# EAGLE board Vocodec_rev3_unbuilt (EAGLE 6.5.0), part 1 of 2
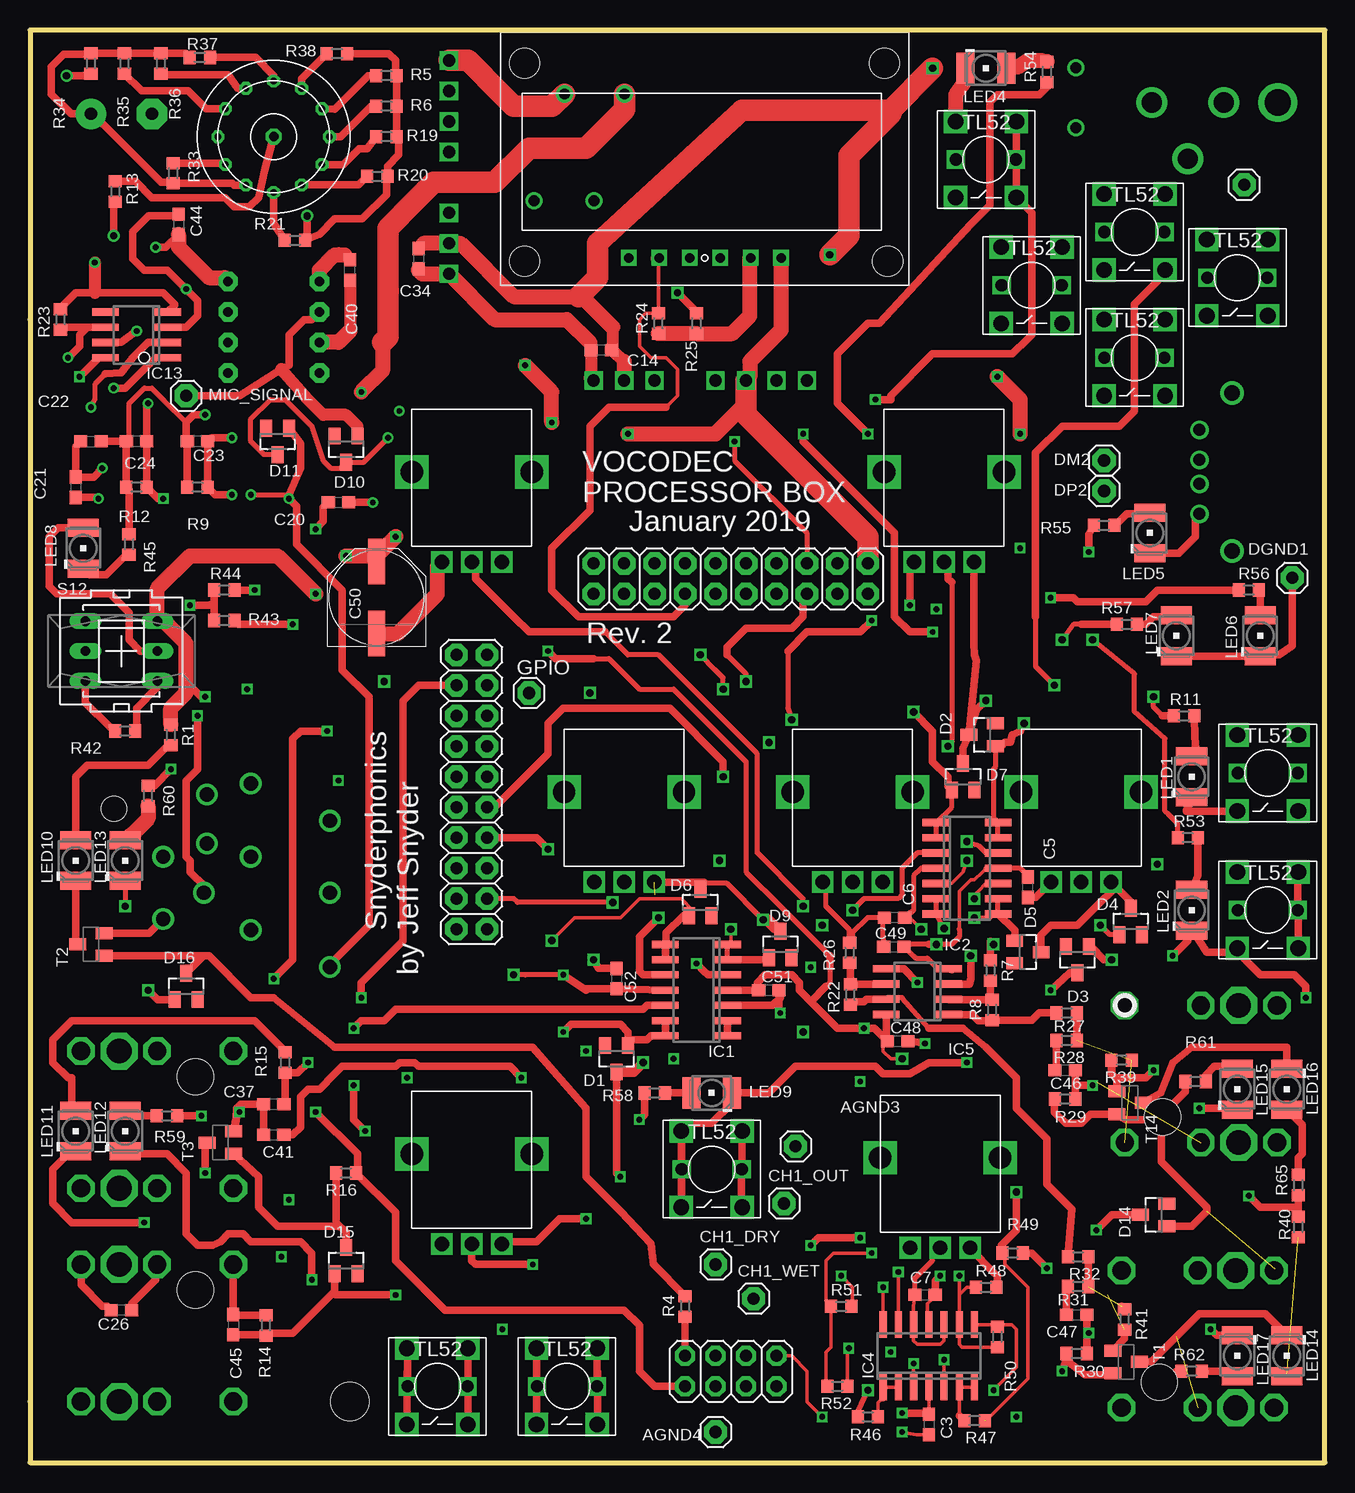
[diagram p0: board, top side]
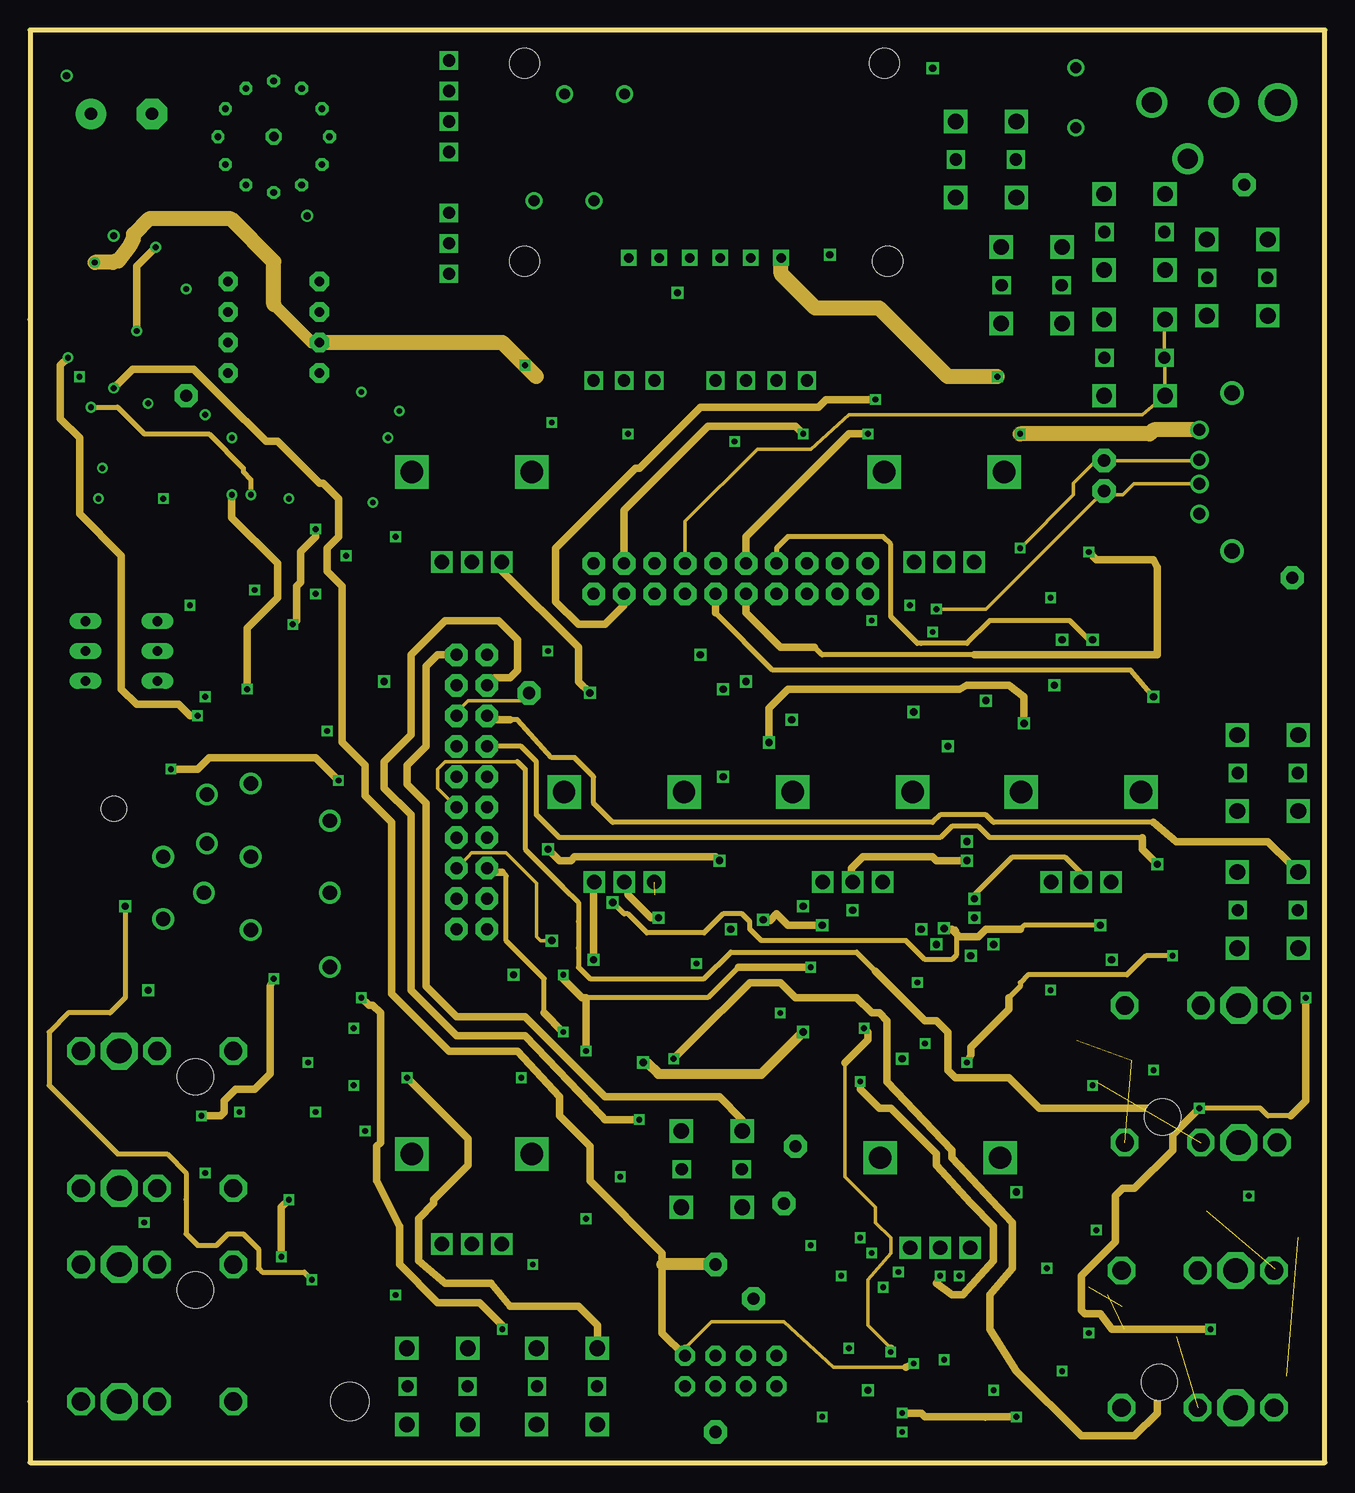
[diagram p1: board, inner layer Route2]
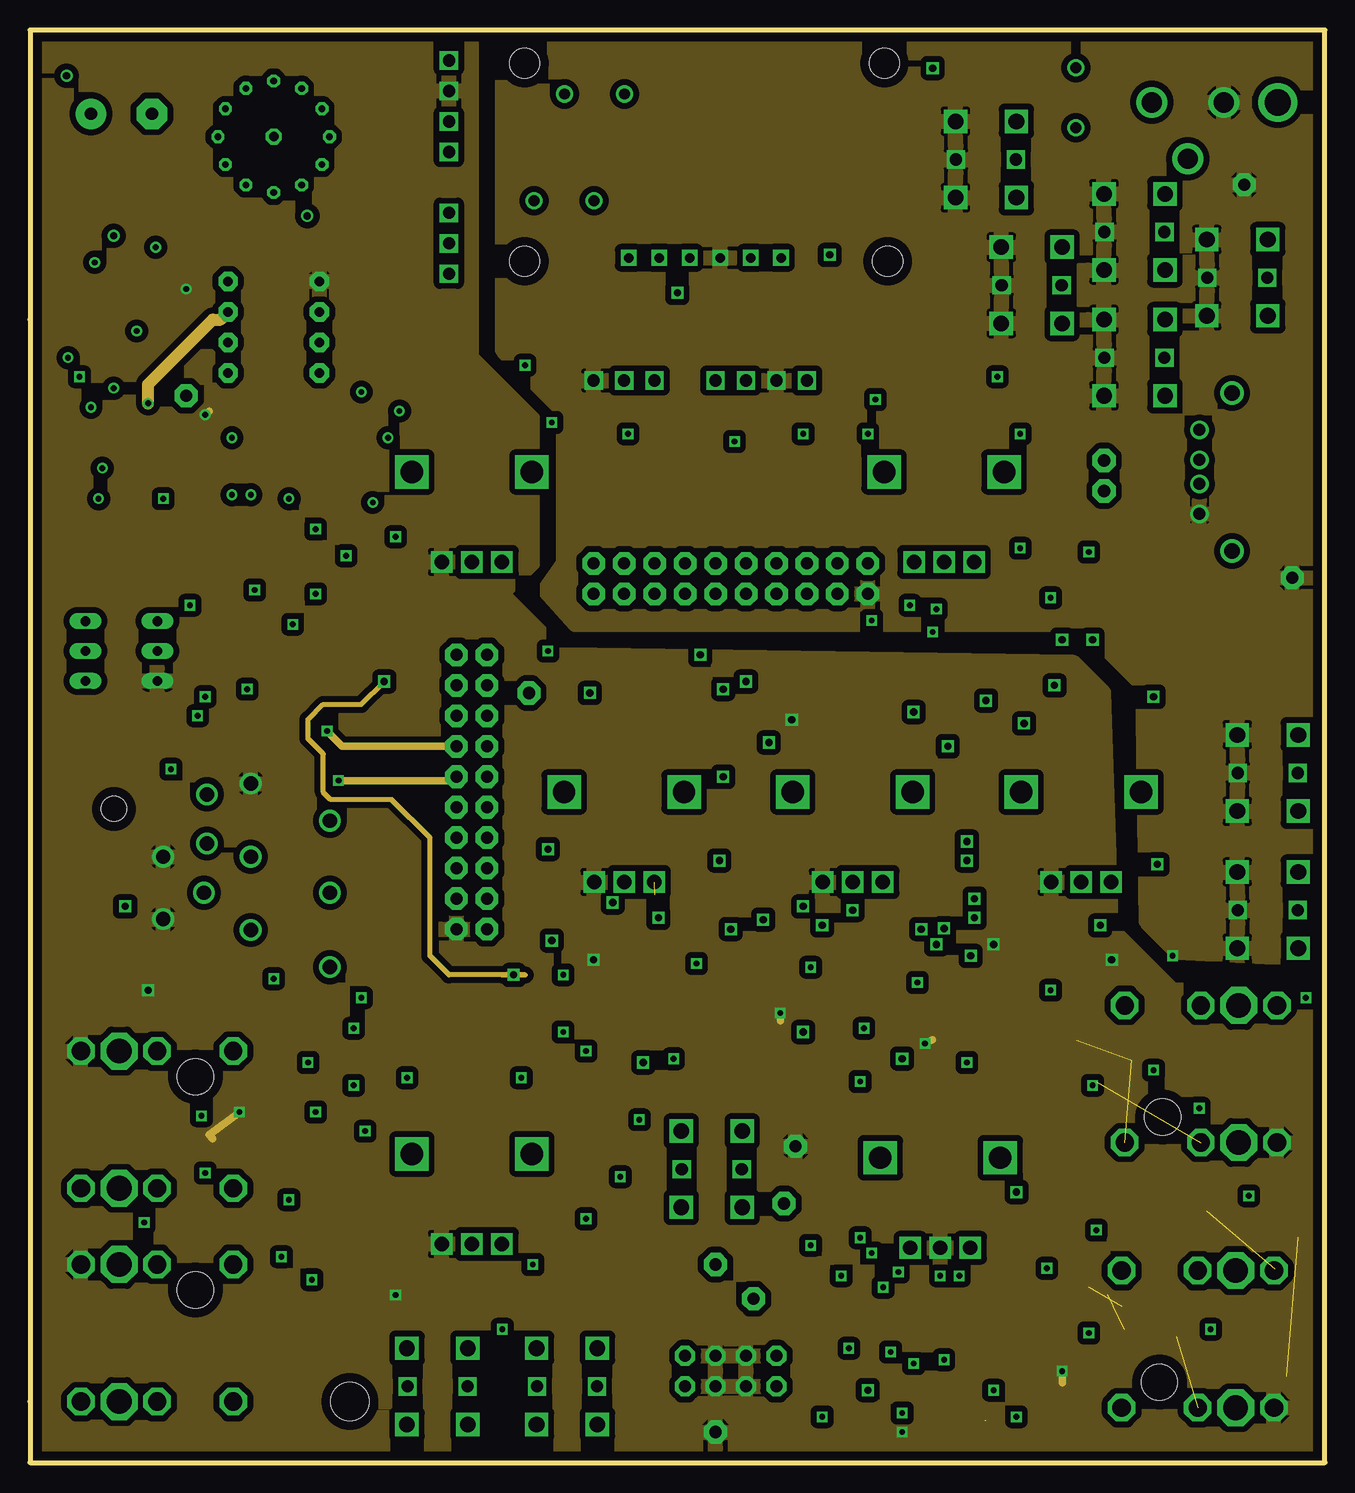
[diagram p2: board, inner layer Route15]
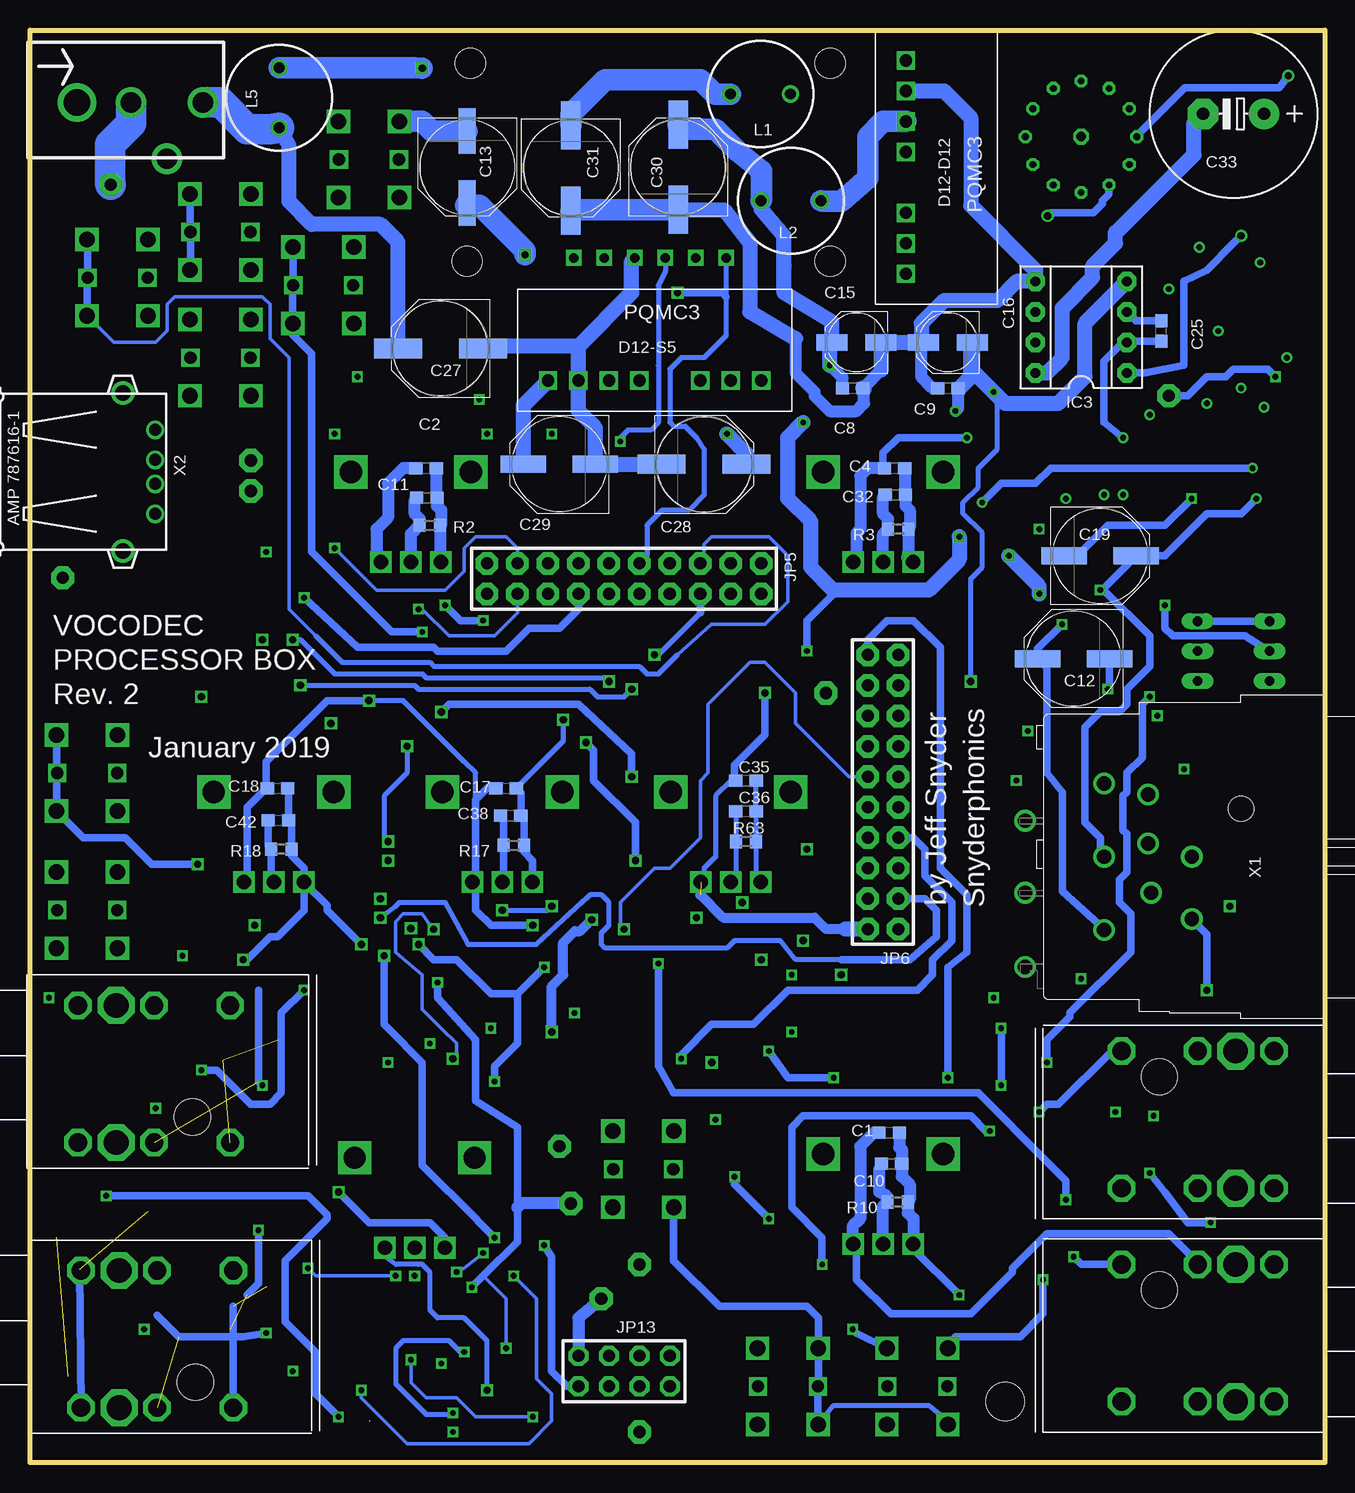
[diagram p3: board, bottom side, seen from below]

Size 107.95 x 119.38 mm. Coordinates in mm from the lower left corner, seen from the top.
Outline: 0,95.25 0,5.08 0,0 107.95,0 107.95,119.38 0,119.38 0,95.25
Copper layers (1+2*15+16): Top 0.035mm / dielectric 1mm / Route2 0.035mm / dielectric 1mm / Route15 0.035mm / dielectric 1mm / Bottom 0.035mm
Design rules "default *": minimum track width 12mil, minimum drill 19mil, track to track 20mil, track to pad 10mil, pad to pad 10mil, via to via 10mil, smd to smd 10mil, copper to edge 30mil, drill to drill 10mil, minimum pad ring 10mil, minimum via ring 8mil, stop-mask expansion 3mil, vias tented up to drill 0mil, thermal gap 10mil
Net classes: 1 POWER: width 0.813 mm, drill 0.559 mm, clearance 0.254 mm; 3 +12V: width 0.61 mm, drill 0.483 mm, clearance 0.254 mm
Holes 3.17 mm at 26.67,5.08 0,124.46 107.95,124.46 107.95,-5.08 0,-5.08
Milling: 4 lines

## Footprints (pad centres in the part's own frame; a part is rotated, then mirrored left to right if it is on the bottom)
1X01 = drill 1.016 pad 1.93 octagon: 1 0,0
C0603 = smd 1.1 x 1: 1 -0.85,0; 2 0.85,0
PANASONIC_E = smd 3.8 x 1.4: + 3,0; - -3,0
PANASONIC_C = smd 2.6 x 1.4: + 2.05,0; - -2.05,0
PANASONIC_F = smd 4 x 1.6: + 3.55,0; - -3.55,0
E5-13 = drill 1.016 pad 2.54: + -2.54,0 | drill 1.016 pad 2.54 octagon: - 2.54,0
SOT23 = smd 1 x 1.4: 1 -0.95,-1.1; 2 0.95,-1.1; 3 0,1.1
SO14 = smd 0.6 x 2.2: 1 -3.81,-2.6; 2 -2.54,-2.6; 3 -1.27,-2.6; 4 0,-2.6; 5 1.27,-2.6; 6 2.54,-2.6; 7 3.81,-2.6; 8 3.81,2.6; 9 2.54,2.6; 10 1.27,2.6; 11 0,2.6; 12 -1.27,2.6; 13 -2.54,2.6; 14 -3.81,2.6
DIL08 = drill 0.813 pad 1.6 octagon: 1 -3.81,-3.81; 2 -1.27,-3.81; 3 1.27,-3.81; 4 3.81,-3.81; 5 3.81,3.81; 6 1.27,3.81; 7 -1.27,3.81; 8 -3.81,3.81
SO08 = smd 0.6 x 2.2: 1 -1.905,-2.6; 2 -0.635,-2.6; 3 0.635,-2.6; 4 1.905,-2.6; 5 1.905,2.6; 6 0.635,2.6; 7 -0.635,2.6; 8 -1.905,2.6
PQMC3-D12-D12-S = drill 1.016 square: P$1 -7.62,0; P$2 -5.08,0; P$3 -2.54,0; P$4 2.54,0; P$5 5.08,0; P$6 7.62,0; P$7 10.16,0
SO8 = smd 0.6 x 2.2: 1 -1.905,-2.6; 2 -0.635,-2.6; 3 0.635,-2.6; 4 1.905,-2.6; 5 1.905,2.6; 6 0.635,2.6; 7 -0.635,2.6; 8 -1.905,2.6
NRJ6HF2 = drill 2.057 octagon: POST1 -7.442,0; POST2 -7.442,-11.43 | drill 1.524 octagon: R -10.6,0; RN -10.6,-11.43; S -4.25,0; SN -4.25,-11.43; T -16.942,0; TN -16.942,-11.43 | hole 2.997: -13.792,-2.134
PJ-059B = drill 1.7: 1 3,0; 2 -3,0; 3 0,-4.7 | drill 2.2: P$1 -7.5,0
2X10 = drill 1.016 pad 1.88 octagon: 1 -11.43,-1.27; 2 -11.43,1.27; 3 -8.89,-1.27; 4 -8.89,1.27; 5 -6.35,-1.27; 6 -6.35,1.27; 7 -3.81,-1.27; 8 -3.81,1.27; 9 -1.27,-1.27; 10 -1.27,1.27; 11 1.27,-1.27; 12 1.27,1.27; 13 3.81,-1.27; 14 3.81,1.27; 15 6.35,-1.27; 16 6.35,1.27; 17 8.89,-1.27; 18 8.89,1.27; 19 11.43,-1.27; 20 11.43,1.27
2X04 = drill 1.016 pad 1.676 octagon: 1 -3.81,-1.27; 2 -3.81,1.27; 3 -1.27,-1.27; 4 -1.27,1.27; 5 1.27,-1.27; 6 1.27,1.27; 7 3.81,-1.27; 8 3.81,1.27
6000-XXXX-RC = drill 0.9 pad 1.422: 1 -2.5,0; 2 2.5,0
PLCC2 = smd 2.6 x 1.5: A 0,1.7; C 0,-1.7
ADAFRUIT_128X32_OLED = drill 0.8 square: P$1 10.668,2.286; P$2 13.208,2.286; P$3 15.748,2.286; P$4 18.288,2.286; P$5 20.828,2.286; P$6 23.368,2.286 | hole 2.489: 2,2; 2,18.5; 32,18.5; 32.258,2
R0603 = smd 1 x 1.1: 1 -0.85,0; 2 0.85,0
PVA2F = drill 0.813 long: 1 -2.997,2.489; 2 -2.997,0; 3 -2.997,-2.489; 4 2.997,2.489; 5 2.997,0; 6 2.997,-2.489
SOT23-BEC = smd 1 x 1.4: B -0.95,-1.1; C 0,1.1; E 0.95,-1.1
56DP30 = drill 0.559 octagon: 1 4.023,-2.324; 2 2.324,-4.023; 3 0,-4.648; 4 -2.324,-4.023; 5 -4.023,-2.324; 6 -4.648,0; 7 -4.023,2.324; 8 -2.324,4.023; 9 0,4.648; 10 2.324,4.023; 11 4.025,2.324; 12 4.648,0 | drill 0.8 octagon: C 0,0
TL52_PLUS = drill 1.016 square: P1_1 -2.5,0; P2_1 2.5,0 | drill 1.3 square: P1_2 -2.54,3.175; P1_3 -2.54,-3.175; P2_2 2.54,3.175; P2_3 2.54,-3.175
RK09 = drill 1.2 square: 1-09 -2.5,-7.5; 2-09 0,-7.5; 3-09 2.5,-7.5 | drill 1.854 square: MOUNT1 -5,0; MOUNT2 5,0
NCJ10FI-H-0 = drill 1.2: 1 -6.1,-18.4; 2 6.1,-18.4; 3 0,-18.4; G 0,-11.1; GN -1.1,-14.75; R -5.2,-14.75; RS -3,-25; S 5.2,-11.1; SS 3,-14.5; T 9.2,-25; TS 3,-25 | hole 2.1: -4,-7
USB = drill 1: 1 -3.5,12.99; 2 -1,12.99; 3 1,12.99; 4 3.5,12.99 | drill 1.3: P$1 -6.57,10.28; P$2 6.57,10.28

## Placement (x,y rotation side)
AGND3  [1X01]  63.82,26.35 0 top
AGND4  [1X01]  57.15,2.54 0 top
C1  .1uf  [C0603]  36.32,27.5 0 bottom
C2  .1uf  [C0603]  74.93,82.87 0 bottom
C3  .1uf  [C0603]  74.93,3.17 270 top
C4  .1uf  [C0603]  35.88,82.87 0 bottom
C5  .1uf  [C0603]  83.19,47.94 90 top
C6  .1uf  [C0603]  72.07,45.4 180 top
C7  .1uf  [C0603]  74.61,13.97 0 top
C8  .33uf  [C0603]  39.37,89.53 0 bottom
C9  .33uf  [C0603]  31.43,89.53 0 bottom
C10  .01uf  [C0603]  36.13,24.89 0 bottom
C11  .01uf  [C0603]  74.87,80.39 0 bottom
C12  47uf  [PANASONIC_E]  20.96,66.99 180 bottom
C13  47uf  [PANASONIC_E]  71.5,107.95 270 bottom
C14  .1uf  [C0603]  47.62,92.71 180 top
C15  10uf  [PANASONIC_C]  39.05,93.34 180 bottom
C16  10uf  [PANASONIC_C]  31.43,93.34 180 bottom
C17  .1uf  [C0603]  68.26,56.2 0 bottom
C18  .1uf  [C0603]  87.31,56.2 0 bottom
C19  47uf  [PANASONIC_E]  18.73,75.56 0 bottom
C20  470pf  [C0603]  25.72,80.01 0 top
C21  470pf  [C0603]  3.81,81.28 270 top
C22  47pf  [C0603]  5.08,85.09 0 top
C23  100pf  [C0603]  13.97,85.09 180 top
C24  100pf  [C0603]  8.89,85.09 180 top
C25  220pf  [C0603]  13.65,94.3 90 bottom
C26  .1uf  [C0603]  7.62,12.7 180 top
C27  100uf  [PANASONIC_F]  73.72,92.84 180 bottom
C28  100uf  [PANASONIC_F]  51.75,83.19 0 bottom
C29  47uf  [PANASONIC_E]  63.82,83.19 180 bottom
C30  100uf  [PANASONIC_F]  53.91,107.95 90 bottom
C31  100uf  [PANASONIC_F]  62.86,107.89 270 bottom
C32  .01uf  [C0603]  35.81,80.64 0 bottom
C33  3300uf  [E5-13]  7.62,112.39 180 bottom
C34  .1uf  [C0603]  32.38,100.33 270 top
C35  .1uf  [C0603]  48.26,56.83 0 bottom
C36  .01uf  [C0603]  48.26,54.29 0 bottom
C37  .1uf  [C0603]  20.32,29.84 180 top
C38  .01uf  [C0603]  67.88,53.91 0 bottom
C40  .1uf  [C0603]  26.67,99.38 90 top
C41  .1uf  [C0603]  20.32,27.3 0 top
C42  .01uf  [C0603]  87.25,53.53 0 bottom
C44  .1uf  [C0603]  12.38,103.19 270 top
C45  .01uf  [C0603]  16.95,11.49 270 top
C46  220pf  [C0603]  86.3,32.7 0 top
C47  220pf  [C0603]  87.25,12.32 0 top
C48  .1uf  [C0603]  72.33,35.12 0 top
C49  .1uf  [C0603]  72.01,42.99 0 top
C50  47uf  [PANASONIC_E]  28.89,72.07 90 top
C51  .1uf  [C0603]  61.59,39.37 0 top
C52  .1uf  [C0603]  48.89,40.32 270 top
CH1_DRY  [1X01]  57.15,16.51 0 top
CH1_OUT  [1X01]  62.86,21.59 0 top
CH1_WET  [1X01]  60.33,13.65 0 top
D1  BAT54  [SOT23]  48.89,33.66 180 top
D2  BAT54  [SOT23]  79.38,60.64 90 top
D3  BAT54  [SOT23]  87.31,41.91 180 top
D4  BAT54  [SOT23]  91.76,45.09 0 top
D5  BAT54  [SOT23]  83.19,42.55 270 top
D6  BAT54  [SOT23]  55.88,46.67 0 top
D7  BAT54  [SOT23]  77.79,57.15 0 top
D9  BAT54  [SOT23]  62.55,43.18 0 top
D10  BAT54  [SOT23]  26.35,84.45 180 top
D11  BAT54  [SOT23]  20.64,85.09 180 top
D14  BAT54  [SOT23]  93.66,20.64 90 top
D15  BAT54  [SOT23]  26.35,16.83 0 top
D16  BAT54  [SOT23]  13.02,39.69 0 top
DGND1  [1X01]  105.22,73.72 0 top
DM2  [1X01]  89.53,83.5 0 top
DP2  [1X01]  89.53,80.96 0 top
GPIO  [1X01]  41.59,64.14 0 top
IC1  TL074D  [SO14]  55.56,39.37 90 top
IC2  TL074D  [SO14]  78.11,49.53 270 top
IC3  INA217P  [DIL08]  20.32,94.61 90 bottom
IC4  TL074D  [SO14]  74.93,8.89 0 top
IC5  NE5532D  [SO08]  73.98,39.24 90 top
IC11  PQMC3-D12-D12-S  [PQMC3-D12-D12-S]  34.92,106.68 90 bottom
IC12  PQMC3-D12-S5-S  [PQMC3-D12-D12-S]  54.61,90.17 180 bottom
IC13  DG469  [SO8]  8.89,93.98 90 top
J1  NRJ6HF2  [NRJ6HF2]  0,34.29 0 bottom
J3  NRJ6HF2  [NRJ6HF2]  108.2,26.67 180 bottom
J4  NRJ6HF2  [NRJ6HF2]  107.95,4.57 180 bottom
J9  NRJ6HF2  [NRJ6HF2]  0,16.51 0 bottom
J10  PJ-059B  [PJ-059B]  96.52,113.35 0 bottom
JP5  [2X10]  58.42,73.66 0 top
JP6  [2X10]  36.83,55.88 90 top
JP13  [2X04]  58.42,7.62 0 top
JP20  [1X01]  101.22,106.49 90 top
L1  [6000-XXXX-RC]  47.05,114.05 180 bottom
L2  [6000-XXXX-RC]  44.51,105.16 180 bottom
L5  [6000-XXXX-RC]  87.19,113.73 90 bottom
LED1  AMBER  [PLCC2]  96.84,57.15 0 top
LED2  GREEN  [PLCC2]  96.84,46.04 0 top
LED4  RED  [PLCC2]  79.69,116.2 270 top
LED5  GREEN  [PLCC2]  93.34,77.47 0 top
LED6  AMBER  [PLCC2]  102.55,68.9 0 top
LED7  RED  [PLCC2]  95.57,68.9 0 top
LED8  GREEN  [PLCC2]  4.45,76.2 0 top
LED9  GREEN  [PLCC2]  56.83,30.8 90 top
LED10  AMBER  [PLCC2]  3.81,50.16 0 top
LED11  AMBER  [PLCC2]  3.81,27.62 0 top
LED12  RED  [PLCC2]  7.94,27.62 0 top
LED13  RED  [PLCC2]  7.94,50.16 0 top
LED14  AMBER  [PLCC2]  104.77,8.89 180 top
LED15  RED  [PLCC2]  100.65,31.12 0 top
LED16  AMBER  [PLCC2]  104.77,31.12 180 top
LED17  RED  [PLCC2]  100.65,8.89 180 top
MIC_SIGNAL  [1X01]  13.02,88.9 0 top
OLED1  ADAFRUIT_931_OLED_128X32  [ADAFRUIT_128X32_OLED]  39.24,98.11 0 top
R1  1k  [R0603]  11.75,60.64 270 top
R2  1M  [R0603]  74.61,78.11 180 bottom
R3  1M  [R0603]  35.56,77.79 180 bottom
R4  200k  [R0603]  54.61,13.02 90 top
R5  1k  [R0603]  29.72,115.57 0 top
R6  2k  [R0603]  29.72,113.03 0 top
R7  10k  [R0603]  80.07,41.02 270 top
R8  10k  [R0603]  80.2,37.72 90 top
R9  1k15  [R0603]  13.97,81.28 0 top
R10  1M  [R0603]  35.62,21.72 180 bottom
R11  560R  [R0603]  96.2,62.23 0 top
R12  1k15  [R0603]  8.89,81.28 0 top
R13  5.1R  [R0603]  7.11,105.92 270 top
R14  1M  [R0603]  19.69,11.43 90 top
R15  1k  [R0603]  21.27,33.34 90 top
R16  200k  [R0603]  26.35,24.13 180 top
R17  1M  [R0603]  67.63,51.44 180 bottom
R18  1M  [R0603]  87,51.12 180 bottom
R19  4.7k  [R0603]  29.72,110.49 0 top
R20  10k  [R0603]  28.96,107.19 0 top
R21  20k  [R0603]  22.1,101.85 0 top
R22  10k  [R0603]  68.39,38.99 90 top
R23  10k  [R0603]  2.54,95.25 90 top
R24  1k  [R0603]  52.39,94.93 90 top
R25  1k  [R0603]  55.56,94.93 90 top
R26  10k  [R0603]  68.33,42.48 90 top
R27  220R  [R0603]  86.42,37.46 180 top
R28  220R  [R0603]  86.42,35.18 180 top
R29  220R  [R0603]  86.3,30.29 0 top
R30  220R  [R0603]  87.25,9.08 0 top
R31  220R  [R0603]  87.38,14.67 180 top
R32  220R  [R0603]  87.38,17.14 180 top
R33  5.1R  [R0603]  11.94,107.44 270 top
R34  15R  [R0603]  5.08,116.59 90 top
R35  47R  [R0603]  7.87,116.59 90 top
R36  91R  [R0603]  10.92,116.59 90 top
R37  200R  [R0603]  14.16,117.09 180 top
R38  510R  [R0603]  25.59,117.41 0 top
R39  200k  [R0603]  91,33.53 180 top
R40  1k  [R0603]  105.73,19.62 270 top
R41  200k  [R0603]  91.25,11.94 270 top
R42  47k  [R0603]  7.94,60.96 180 top
R43  680R  [R0603]  16.19,70.17 0 top
R44  680R  [R0603]  16.19,72.71 0 top
R45  680R  [R0603]  8.25,76.52 270 top
R46  15k  [R0603]  69.85,3.81 0 top
R47  15k  [R0603]  78.74,3.49 180 top
R48  15k  [R0603]  79.69,14.61 0 top
R49  15k  [R0603]  81.91,17.46 180 top
R50  51k  [R0603]  80.64,10.48 270 top
R51  15k  [R0603]  67.63,13.02 0 top
R52  15k  [R0603]  67.31,6.35 180 top
R53  560R  [R0603]  96.52,52.07 0 top
R54  560R  [R0603]  84.77,115.89 90 top
R55  560R  [R0603]  89.53,78.11 0 top
R56  560R  [R0603]  101.6,72.71 0 top
R57  560R  [R0603]  91.44,69.85 0 top
R58  560R  [R0603]  52.07,30.8 0 top
R59  560R  [R0603]  11.43,28.89 180 top
R60  560R  [R0603]  9.84,55.56 270 top
R61  560R  [R0603]  97.16,31.75 0 top
R62  560R  [R0603]  96.84,7.62 0 top
R63  1M  [R0603]  48.26,51.75 180 bottom
R65  1k  [R0603]  105.73,23.11 90 top
S12  PVA2  [PVA2F]  7.62,67.63 180 top
T1  [SOT23-BEC]  91.38,8.38 270 top
T2  [SOT23-BEC]  5.08,43.18 90 top
T3  [SOT23-BEC]  15.87,26.67 90 top
T14  [SOT23-BEC]  91.69,29.97 270 top
U$1  56DP30  [56DP30]  20.32,110.49 270 top
U$7  TL52_PLUS  [TL52_PLUS]  79.69,108.58 0 top
U$11  TL52_PLUS  [TL52_PLUS]  92.08,102.55 0 top
U$12  RK09  [RK09]  36.83,25.72 0 top
U$14  RK09  [RK09]  75.88,25.4 0 top
U$16  RK09  [RK09]  49.53,55.88 0 top
U$27  RK09  [RK09]  87.63,55.88 0 top
U$28  RK09  [RK09]  68.58,55.88 0 top
U$31  RK09  [RK09]  76.2,82.55 0 top
U$32  RK09  [RK09]  36.83,82.55 0 top
U$33  TL52_PLUS  [TL52_PLUS]  100.65,98.74 0 top
U$39  TL52_PLUS  [TL52_PLUS]  83.5,98.11 0 top
U$40  TL52_PLUS  [TL52_PLUS]  92.08,92.08 0 top
U$42  TL52_PLUS  [TL52_PLUS]  103.19,57.47 0 top
U$43  TL52_PLUS  [TL52_PLUS]  103.19,46.04 0 top
U$44  TL52_PLUS  [TL52_PLUS]  56.83,24.45 0 top
U$45  TL52_PLUS  [TL52_PLUS]  44.77,6.35 0 top
U$48  TL52_PLUS  [TL52_PLUS]  33.97,6.35 0 top
X1  NCJ10FI-H-0  [NCJ10FI-H-0]  0,50.48 270 bottom
X2  [USB]  110.49,82.55 270 bottom

## Library data of the parts
AGND3 AGND4 CH1_DRY CH1_OUT CH1_WET DGND1 DM2 DP2 GPIO JP20 MIC_SIGNAL = adafruit; PARTNO: *DNP
C1-C7 C14 C17 C18 C26 C34 C35 C37 C40 C41 C44 C48 C49 C51 C52 = rcl; PARTNO: CC0603KRX7R8BB104
C8 C9 = rcl; PARTNO: C1608X7R1H334K080AC
C10 C11 C32 C36 C38 C42 C45 = rcl; PARTNO: CC0603KRX7R8BB103
C12 C13 C19 C29 C50 = adafruit; PARTNO: EEE-1VA470AP
C15 C16 = adafruit; PARTNO: EEE-1VA100AR
C20 C21 = rcl; PARTNO: CC0603JRNPO9BN471
C22 = rcl; PARTNO: C0603C470J5GACTU
C23 C24 = rcl; PARTNO: C0603C101J3GACTU
C25 C46 C47 = rcl; PARTNO: CC0603JRNPO9BN221
C27 C28 C30 C31 = adafruit; PARTNO: EEE-1EA101P
C33 = adafruit; PARTNO: EEU-FR1A332
D1-D7 D9-D11 D14-D16 = diode; PARTNO: BAT54
IC1 IC2 IC4 = linear; PARTNO: TL074CDR
IC3 = burr-brown; MF: TEXAS INSTRUMENTS; MPN: INA217AIP; OC_FARNELL: 1212423; OC_NEWARK: 74C9859; PARTNO: *DNP
IC5 = linear; PARTNO: NE5532DR
IC11 = custom; PARTNO: PQMC3-D12-D12-S
IC12 = custom; PARTNO: PQMC3-D12-S5-S
IC13 = custom; PARTNO: DG469EY-T1-E3
J1 J3 J4 J9 = custom; PARTNO: NRJ6HM-1
J10 = custom; PARTNO: PJ-059A
JP5 JP6 = SparkFun-Connectors; PARTNO: PRPC010DAAN-RC
JP13 = adafruit; PARTNO: PRPC004DAAN-RC
L1 L2 L5 = rcl; PARTNO: RLB9012-100KL
LED1 LED6 LED10 LED11 LED14 LED16 = led; COLOR: green; PARTNO: HSMU-A100-S00J1
LED2 LED5 LED8 LED9 = led; COLOR: green; PARTNO: HSMM-A101-R00J1
LED4 LED7 LED12 LED13 LED15 LED17 = led; COLOR: green; PARTNO: HSMZ-A100-R00J1
OLED1 = custom; PARTNO: 931
R1 R5 R15 R24 R25 R40 R65 = resistor; PARTNO: ESR03EZPF1001
R2 R3 R10 R14 R17 R18 R63 = resistor; PARTNO: CRCW06031M00FKEAHP
R4 R16 R39 R41 = resistor; PARTNO: ESR03EZPJ204
R6 = resistor; PARTNO: ERJ-PA3F2001V
R7 R8 R20 R22 R23 R26 = resistor; PARTNO: ESR03EZPF1002
R9 R12 = resistor; PARTNO: ERA-3AEB1151V
R11 R53-R62 = resistor; PARTNO: ESR03EZPF5600
R13 R33 = resistor; PARTNO: RC0603JR-075R1L
R19 = resistor; PARTNO: CRCW06034K70FKEAHP
R21 = resistor; PARTNO: ESR03EZPF2002
R27-R32 = resistor; PARTNO: ESR03EZPJ221
R34 = resistor; PARTNO: RC0603JR-0715RL
R35 = resistor; PARTNO: RC0603JR-0747RL
R36 = resistor; PARTNO: RC0603JR-0791RL
R37 = resistor; PARTNO: RC0603JR-07200RL
R38 = resistor; PARTNO: RC0603JR-07510RL
R42 = resistor; PARTNO: ESR03EZPJ473
R43-R45 = resistor; PARTNO: CRCW0603680RJNEAHP
R46-R49 R51 R52 = resistor; PARTNO: ESR03EZPF1502
R50 = resistor; PARTNO: ERJ-PA3F5102V
S12 = switch-misc; PARTNO: PVA2 OA H4 1.7N V2
T1-T3 T14 = transistor; PARTNO: MMBT3904-TP
U$1 = custom; PARTNO: 56DP30-01-1-AJN
U$7 U$11 U$12 U$14 U$16 U$27 U$28 U$31-U$33 U$39 U$40 U$42-U$45 U$48 = custom; PARTNO: *DNP
X1 = con-neutrik_ag; MPN: NCJ10FI-H-0; OC_FARNELL: unknown; OC_NEWARK: 99B1398; PARTNO: NCJ10FI-H-01
X2 = con-amp; PARTNO: 292303-1

## Nets
3V0: OLED1.P$5 R24.1 R25.1
3V3: C1.1 C2.1 C4.1 C17.1 C18.1 C26.1 C35.1 D1.3 D2.3 D4.3 D5.3 D6.3 D7.3 D9.3 D10.3 D11.3 J9.R JP6.1 U$12.3-09 U$16.3-09 U$27.3-09 U$28.3-09 U$31.3-09 U$32.3-09
5V0: C28.+ IC12.P$5 JP5.20 OLED1.P$6 X2.1
9V0: C13.+ C14.1 C34.1 IC11.P$2 IC12.P$2 L5.2
+12V: C3.1 C6.1 C8.1 C15.+ C30.+ C37.1 C40.1 C48.1 C50.+ C51.1 IC1.4 IC2.4 IC3.7 IC4.4 IC5.8 IC13.4 L2.2 R1.1 R15.1 R23.2 R40.1 R65.1 S12.3 S12.6
-12V: C5.2 C7.2 C9.2 C16.- C31.- C41.2 C44.2 C49.2 C52.2 IC1.11 IC2.11 IC3.4 IC4.11 IC5.4 IC13.7 L1.2
ADC0: D5.1 IC2.8 IC2.9 JP6.4
ADC1: D4.1 IC2.6 IC2.7 JP6.3
ADC2: D6.1 IC1.8 IC1.9 JP6.6
ADC3: D1.1 IC1.13 IC1.14 JP6.5
ADC4: D2.1 IC2.13 IC2.14 JP6.7
ADC6: D7.1 IC2.1 IC2.2 JP6.9
ADC14: D9.1 IC1.6 IC1.7 JP6.11
AGND: AGND3.1 AGND4.1 C1.2 C2.2 C3.2 C4.2 C5.1 C6.2 C7.1 C8.2 C9.1 C10.2 C11.2 C15.- C16.+ C17.2 C18.2 C22.2 C23.2 C24.2 C26.2 C30.- C31.+ C32.2 C35.2 C36.2 C37.2 C38.2 C40.2 C41.1 C42.2 C44.1 C45.2 C48.2 C49.1 C50.- C51.2 C52.1 D3.1 D14.1 D15.1 D16.1 IC1.3 IC3.5 IC4.10 IC4.12 IC11.P$6 IC13.3 J1.S J3.S J4.S J9.S JP6.2 JP13.3 JP13.4 JP13.5 JP13.6 R2.1 R3.1 R7.1 R9.1 R10.1 R12.1 R14.1 R17.1 R18.1 R26.2 R29.1 R30.1 R42.1 R45.1 R63.1 S12.1 T1.E T2.E T3.E T14.E U$12.1-09 U$14.2-09 U$16.1-09 U$27.1-09 U$28.1-09 U$31.1-09 U$32.1-09 X1.1 X1.G X1.S
AUDIOINR: J1.T JP13.1 R16.1
AUDIOOUTL: CH1_WET.1 IC4.5 JP13.8
AUDIOOUTR: IC5.3 JP13.7
D2_N: DM2.1 JP5.18 X2.2
D2_P: DP2.1 JP5.17 X2.3
DGND: C13.- C14.2 C27.- C28.- C29.- C34.2 DGND1.1 IC11.P$1 IC12.P$1 IC12.P$6 J10.2 JP5.19 JP20.1 LED1.C LED2.C LED4.C LED5.C LED6.C LED7.C LED9.C LED12.C LED13.C LED15.C LED17.C OLED1.P$4 U$7.P1_1 U$7.P1_2 U$7.P1_3 U$11.P1_1 U$11.P1_2 U$11.P1_3 U$33.P1_1 U$33.P1_2 U$33.P1_3 U$39.P1_1 U$39.P1_2 U$39.P1_3 U$40.P1_1 U$40.P1_2 U$40.P1_3 U$42.P1_1 U$42.P1_2 U$42.P1_3 U$43.P1_1 U$43.P1_2 U$43.P1_3 U$44.P1_1 U$44.P1_2 U$44.P1_3 U$45.P1_1 U$45.P1_2 U$45.P1_3 U$48.P1_1 U$48.P1_2 U$48.P1_3 X2.4
MIC_OR_LINE_SIGNAL: CH1_DRY.1 IC4.3 IC13.1 JP13.2 R4.1
MIC_SIGNAL: D10.1 IC3.6 IC13.8 MIC_SIGNAL.1
N$1: IC5.2 R7.2 R8.2
N$2: IC5.6 R22.2 R26.1
N$3: LED10.C T2.C
N$4: IC5.1 R8.1 R27.2
N$5: LED10.A R1.2
N$6: IC1.1 IC1.2
N$7: LED11.C T3.C
N$8: D16.3 R4.2 T2.B
N$9: IC5.7 R22.1 R32.2
N$10: IC13.6 R23.1 X1.SS
N$11: LED11.A R15.2
N$12: C33.+ R5.2 R6.2 R19.2 R20.2 R21.2 R33.2 R34.2 R35.2 R36.2 R37.2 R38.2 U$1.1
N$13: D15.3 R16.2 T3.B
N$14: IC11.P$5 L2.1
N$15: IC11.P$7 L1.1
N$16: LED14.C T1.C
N$17: LED14.A R40.2
N$18: JP6.19 U$45.P2_1 U$45.P2_2 U$45.P2_3
N$19: R21.1 U$1.12
N$20: R20.1 U$1.11
N$21: C12.- C23.1 C25.1 IC3.2 R9.2
N$22: C19.+ C21.2 R44.2 X1.3
N$23: C12.+ C20.1 R43.2 X1.2
N$24: C20.2 C21.1 C22.1
N$25: LED16.C T14.C
N$26: LED16.A R65.2
N$27: R19.1 U$1.10
N$28: R6.1 U$1.9
N$29: C19.- C24.1 C25.2 IC3.3 R12.2
N$30: LED8.A S12.2
N$31: IC3.1 R13.2
N$32: D11.1 IC13.2 X1.T
N$33: R5.1 U$1.8
N$34: R38.1 U$1.7
N$35: R13.1 U$1.C
N$36: R37.1 U$1.6
N$37: R36.1 U$1.5
N$38: R35.1 U$1.4
N$39: R34.1 U$1.3
N$40: R33.1 U$1.2
N$41: J3.T R27.1 R28.1 R39.1
N$42: C46.2 J3.R R29.2
N$43: R42.2 S12.4
N$44: C47.2 J4.R R30.2
N$45: D3.3 R39.2 T14.B
N$46: C46.1 R28.2
N$47: C47.1 R31.2
N$48: J4.T R31.1 R32.1 R41.1
N$49: LED8.C R45.2
N$50: C27.+ J10.1 L5.1
N$51: IC4.1 IC4.2 R46.2
N$52: D14.3 R41.2 T1.B
N$53: C29.+ IC12.P$7
N$54: R43.1 R44.1 S12.5
N$55: IC4.6 IC4.7 R47.2
N$56: R46.1 R48.2 U$14.3-09
N$57: C36.1 IC1.10 R63.2 U$16.2-09
N$58: IC4.8 R50.1 R51.2
N$59: IC4.9 R48.1 R49.1 R50.2
N$60: IC4.13 R51.1 R52.2
N$62: LED1.A R11.2
N$63: LED2.A R53.2
N$64: CH1_OUT.1 IC4.14 IC5.5 R52.1
N$65: LED4.A R54.2
N$66: LED5.A R55.2
N$67: JP6.18 U$48.P2_1 U$48.P2_2 U$48.P2_3
N$68: C33.- IC3.8
N$69: LED9.A R58.2
N$70: JP6.17 R58.1
N$71: LED6.A R56.2
N$72: LED7.A R57.2
N$73: JP6.15 U$43.P2_1 U$43.P2_2 U$43.P2_3
N$74: JP6.13 U$42.P2_1 U$42.P2_2 U$42.P2_3
N$75: LED12.A R59.2
N$76: LED13.A R60.2
N$77: JP6.20 U$44.P2_1 U$44.P2_2 U$44.P2_3
N$78: LED15.A R61.2
N$79: LED17.A R62.2
N$80: JP6.14 R59.1
N$81: JP6.12 R60.1
N$82: JP6.10 R61.1
N$83: JP6.8 R62.1
N$84: GPIO.1 JP6.16
N$85: R47.1 R49.2 U$14.1-09
PA8: JP5.13 R56.1
PA9: JP5.16 OLED1.P$3
PA10: JP5.15 R57.1
PB12: JP5.4 U$39.P2_1 U$39.P2_2 U$39.P2_3
PB13: JP5.3 U$7.P2_1 U$7.P2_2 U$7.P2_3
PB14: JP5.6 U$33.P2_1 U$33.P2_2 U$33.P2_3
PB15: JP5.5 U$11.P2_1 U$11.P2_2 U$11.P2_3
PC6: JP5.9 R11.1
PC7: JP5.12 R54.1
PC8: JP5.11 R55.1
PC9: JP5.14 R53.1
PD11_NOTIMER: JP5.8 U$40.P2_1 U$40.P2_2 U$40.P2_3
POT1: C10.1 IC1.12 R10.2 U$12.2-09
POT3: C32.1 IC2.3 R3.2 U$32.2-09
POT4: C11.1 IC2.12 R2.2 U$31.2-09
POT7: C38.1 IC2.5 R17.2 U$28.2-09
POT8: C42.1 IC2.10 R18.2 U$27.2-09
POT9: C45.1 IC1.5 J9.T R14.2
SCL: JP5.7 OLED1.P$2 R24.2
SDA: JP5.10 OLED1.P$1 R25.2